# EAGLE board Brick_Doc_02 (EAGLE 6.4)
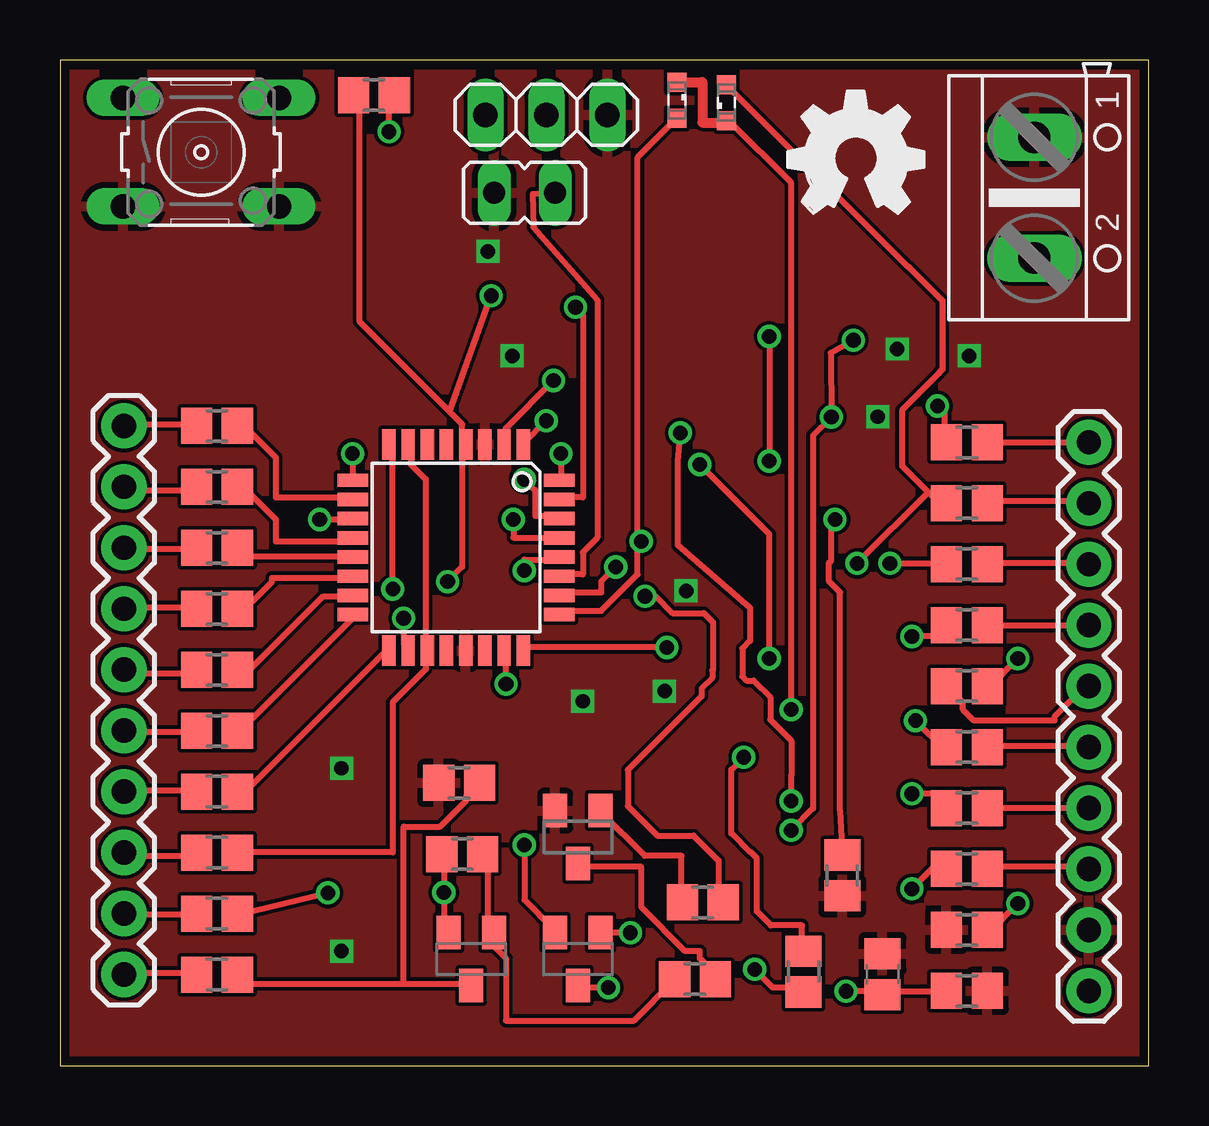
[diagram p0: board, top side]
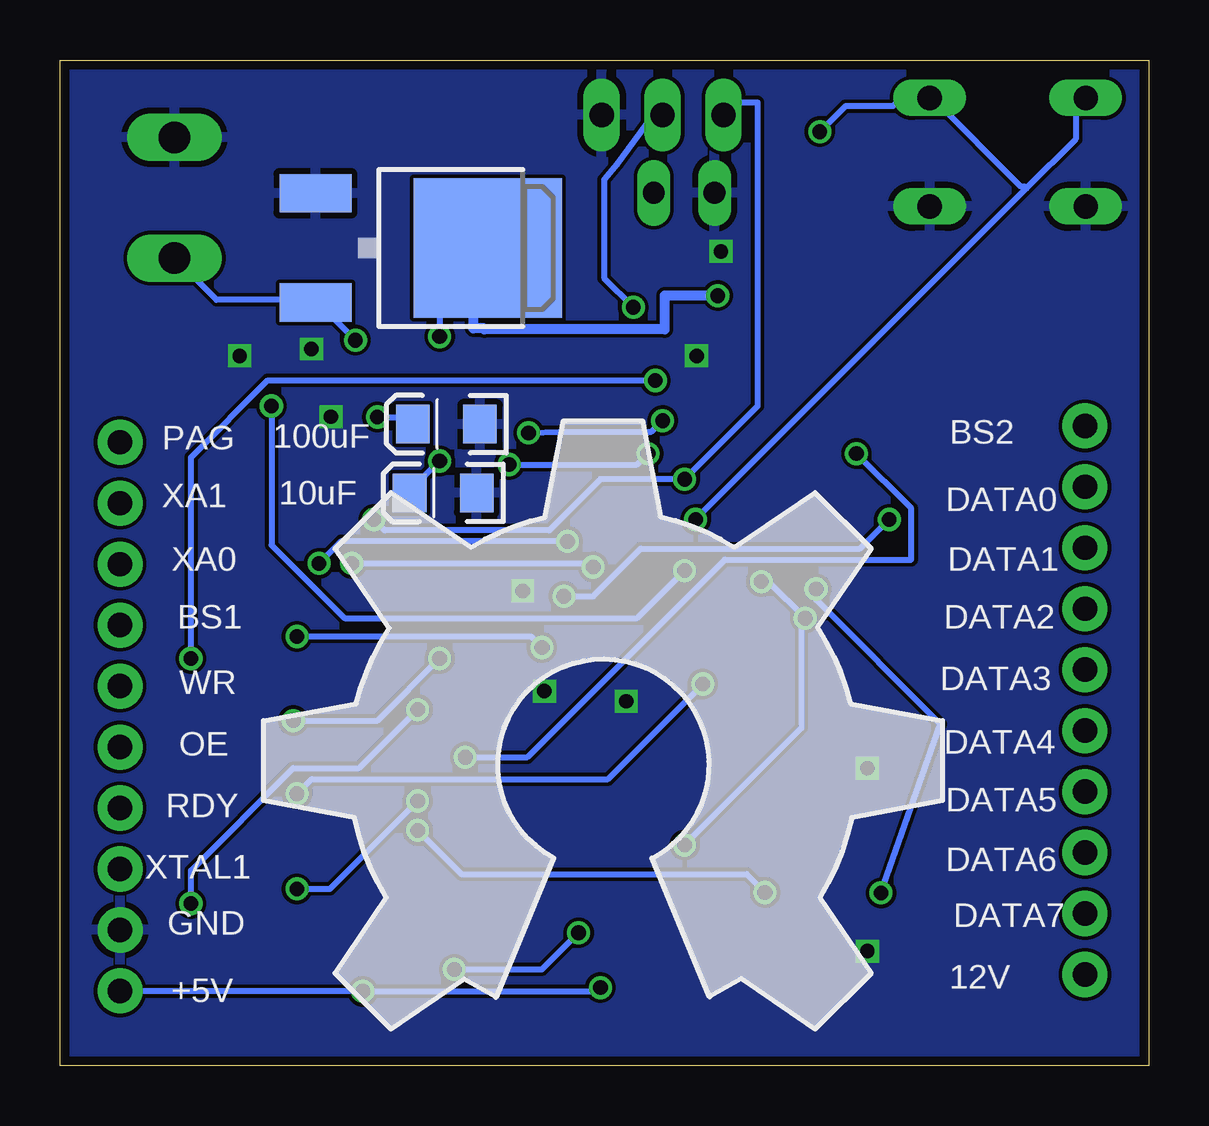
[diagram p1: board, bottom side, seen from below]

Size 45.39 x 41.9 mm. Coordinates in mm from the lower left corner, seen from the top.
Outline: 0,0 45.39,0 45.39,41.9 0,41.9 0,0
Copper layers (1*16): Top 0.0356mm / dielectric 1.5011mm / Bottom 0.0356mm
Design rules "LaenPCBOrder": minimum track width 6mil, minimum drill 13mil, track to track 6mil, track to pad 6mil, pad to pad 6mil, via to via 6mil, smd to smd 6mil, copper to edge 15mil, drill to drill 6mil, minimum pad ring 7mil, minimum via ring 7mil, stop-mask expansion 4mil, vias tented up to drill 0mil, thermal gap 10mil

## Footprints (pad centres in the part's own frame; a part is rotated, then mirrored left to right if it is on the bottom)
EIA3216 = smd 1.4 x 1.6: A 1.4,0; C -1.4,0
C0805 = smd 1.3 x 1.5: 1 -0.85,0; 2 0.85,0
V-REG_DPACK = smd 1.6 x 3: 1 -2.28,-4.8; 3 2.28,-4.8 | smd 5.8 x 6.2: 4 0,2.38
TQFP32-08 = smd 1.27 x 0.559: 1 -4.293,2.8; 2 -4.293,2; 3 -4.293,1.2; 4 -4.293,0.4; 5 -4.293,-0.4; 6 -4.293,-1.2; 7 -4.293,-2; 8 -4.293,-2.8; 17 4.293,-2.8; 18 4.293,-2; 19 4.293,-1.2; 20 4.293,-0.4; 21 4.293,0.4; 22 4.293,1.2; 23 4.293,2; 24 4.293,2.8 | smd 0.559 x 1.27: 9 -2.8,-4.293; 10 -2,-4.293; 11 -1.2,-4.293; 12 -0.4,-4.293; 13 0.4,-4.293; 14 1.2,-4.293; 15 2,-4.293; 16 2.8,-4.293; 25 2.8,4.293; 26 2,4.293; 27 1.2,4.293; 28 0.4,4.293; 29 -0.4,4.293; 30 -1.2,4.293; 31 -2,4.293; 32 -2.8,4.293
JP1 = drill 0.914 long: 1 0,-1.27; 2 0,1.27
1X03 = drill 1.016 long: 1 -2.54,0; 2 0,0; 3 2.54,0
1X10 = drill 1.016 pad 1.88: 1 0,0; 2 2.54,0; 3 5.08,0; 4 7.62,0; 5 10.16,0; 6 12.7,0; 7 15.24,0; 8 17.78,0; 9 20.32,0; 10 22.86,0
SML0603 = smd 0.8 x 0.8: A 0.75,0; C -0.75,0
SOT23-BEC = smd 1 x 1.4: B -0.95,-1.1; C 0,1.1; E 0.95,-1.1
R0805 = smd 1.3 x 1.5: 1 -0.85,0; 2 0.85,0
B3F-10XX = drill 1.016 long: 1 -3.251,2.261; 2 3.251,2.261; 3 -3.251,-2.261; 4 3.251,-2.261
SOT23 = smd 1 x 1.4: 1 -0.95,-1.1; 2 0.95,-1.1; 3 0,1.1
AK500/2 = drill 1.321 long: 1 -2.515,0; 2 2.515,0

## Placement (x,y rotation side)
C1  100uF  [EIA3216]  29.29,26.73 180 bottom
C2  10uF  [EIA3216]  29.42,23.87 180 bottom
C3  10nF  [C0805]  34.29,3.81 90 top
IC1  7805  [V-REG_DPACK]  29.94,34.07 270 bottom
IC2  ATMEGA8-DOC  [TQFP32-08]  16.51,21.59 270 top
JP1  ERASE  [JP1]  19.37,36.36 270 top
JP2  RS232  [1X03]  20.27,39.62 180 top
JP4  M10"  [1X10]  42.88,25.97 270 top
JP5  M10"  [1X10]  2.67,3.8 90 top
LED1  red  [SML0603]  25.72,40.23 270 top
LED2  green  [SML0603]  27.78,40.13 90 top
Q1  BC857  [SOT23-BEC]  21.59,4.45 180 top
Q2  BC857  [SOT23-BEC]  17.14,4.45 180 top
R1  10K  [R0805]  16.77,8.81 0 top
R2  1K  [R0805]  26.47,3.61 0 top
R3  100  [R0805]  6.55,3.79 180 top
R4  4K7  [R0805]  26.79,6.8 0 top
R5  330  [R0805]  37.8,5.65 0 top
R6  4K7  [R0805]  30.99,3.92 90 top
R7  1K  [R0805]  37.8,10.73 0 top
R8  1K  [R0805]  37.8,18.35 0 top
R9  1K  [R0805]  37.8,20.89 0 top
R10  1K  [R0805]  37.8,23.43 0 top
R11  1K  [R0805]  37.8,25.97 0 top
R12  1K  [R0805]  6.55,8.87 180 top
R13  1K  [R0805]  6.55,6.33 180 top
R14  1K  [R0805]  37.8,13.27 0 top
R15  1K  [R0805]  37.8,8.19 0 top
R16  1K  [R0805]  37.8,15.81 180 top
R17  1K  [R0805]  6.55,26.65 180 top
R18  1K  [R0805]  6.55,24.11 180 top
R19  1K  [R0805]  6.55,21.57 180 top
R20  1K  [R0805]  6.55,19.03 180 top
R21  1K  [R0805]  6.55,16.49 180 top
R22  1K  [R0805]  6.55,13.95 180 top
R23  1K  [R0805]  6.55,11.41 180 top
R24  1K  [R0805]  16.64,11.78 0 top
R25  100  [R0805]  37.8,3.11 180 top
R26  1K  [R0805]  13.08,40.43 180 top
R27  10K  [R0805]  32.61,7.92 270 top
S1  START  [B3F-10XX]  5.88,38.06 0 top
T2  BC847  [SOT23]  21.59,9.53 180 top
U$1  [OSHW_FILLX200_NOTEXT]  30.34,35.52 0 top
U$2  [OSHW_FILLX1000_NOTEXT]  36.93,1.49 0 bottom
X1  [AK500/2]  40.62,36.16 270 top

## Library data of the parts
C1 C2 IC1 IC2 JP4 JP5 = SparkFun
C3 R1-R27 = resistor
JP1 = jumper
JP2 = pinhead
LED1 LED2 = led
Q1 Q2 = transistor-pnp
S1 = switch-omron
T2 = transistor
U$1 U$2 = ohw-logo
X1 = con-ptr500

## Nets
+5V: C3.1 JP4.10 Q1.C R25.2
+12V: JP5.1 R3.2
BS1: JP4.4 R8.2
BS2: JP5.10 R17.2
DATA0: JP5.9 R18.2
DATA1: JP5.8 R19.2
DATA2: JP5.7 R20.2
DATA3: JP5.6 R21.2
DATA4: JP5.5 R22.2
DATA5: JP5.4 R23.2
DATA6: JP5.3 R12.2
DATA7: JP5.2 R13.2
GND: C1.C C2.C C3.2 IC1.1 IC2.3 IC2.21 JP1.1 JP2.1 JP4.9 R5.1 R24.1 R25.1 R27.2 S1.3 S1.4 T2.2 X1.1
N$1: Q1.B R6.1
N$2: IC2.12 R18.1
N$3: IC2.31 JP2.2
N$4: IC2.28 R11.1
N$5: IC2.2 R16.1
N$6: IC2.32 R14.1
N$7: IC2.30 JP2.3 R27.1
N$8: R2.2 T2.3
N$9: IC2.7 IC2.19 R12.1
N$10: IC2.8 R13.1
N$11: IC2.11 R4.2
N$12: IC2.9 R6.2
N$14: IC2.13 R19.1
N$16: IC2.14 R20.1
N$19: IC2.1 R15.1
N$21: IC2.23 R7.1
N$22: Q2.C R3.1 R24.2
N$24: IC2.15 R21.1
N$25: IC2.16 R22.1
N$26: IC2.17 R23.1
N$27: IC2.10 R17.1
N$29: R4.1 T2.1
N$31: IC2.27 JP1.2
N$32: LED1.C LED2.C R5.2
N$34: Q2.B R1.2 R2.1
N$42: IC2.24 R8.1
N$43: IC2.29 R26.1 S1.1 S1.2
N$47: IC2.26 LED2.A R10.1
N$48: IC2.25 LED1.A R9.1
OE: JP4.6 R14.2
PAG: JP4.1 R11.2
RDY: JP4.7 R7.2
V+: C1.A IC1.3 Q2.E R1.1 X1.2
VCC: C2.A IC1.4 IC2.4 IC2.18 Q1.E R26.2
WR: JP4.5 R16.2
XA0: JP4.3 R9.2
XA1: JP4.2 R10.2
XTAL1: JP4.8 R15.2

## Tracks (layer width: path | path; a pad name or v marks a point on that pad's centre or on a via)
+5V  (via drill 0.61)
  Top 0.254: v22.86,3.25 21.64,3.25 Q1.C | 34.29,3.1 v32.77,3.1 | 34.29,3.1 36.88,3.1 R25.2 | 34.29,3.1 C3.1
  Bottom 0.254: v22.86,3.25 23.01,3.1 v32.77,3.1 42.82,3.1 JP4.10
+12V
  Top 0.254: R3.2 5.64,3.86 2.74,3.86 JP5.1
BS1
  Top 0.254: R8.2 38.71,18.34 42.82,18.34 JP4.4
BS2
  Top 0.254: R17.2 5.64,26.72 2.74,26.72 JP5.10
DATA0
  Top 0.254: R18.2 5.64,23.98 2.74,23.98 JP5.9
DATA1
  Top 0.254: R19.2 5.64,21.54 2.74,21.54 JP5.8
DATA2
  Top 0.254: R20.2 5.64,19.1 2.74,19.1 JP5.7
DATA3
  Top 0.254: R21.2 5.64,16.36 2.74,16.36 JP5.6
DATA4
  Top 0.254: R22.2 5.64,13.92 2.74,13.92 JP5.5
DATA5
  Top 0.254: R23.2 5.64,11.48 2.74,11.48 JP5.4
DATA6
  Top 0.254: R12.2 5.64,8.74 2.74,8.74 JP5.3
DATA7
  Top 0.254: R13.2 5.64,6.3 2.74,6.3 JP5.2
GND  (via drill 0.6)
  other vias: 17.84,33.93 18.85,29.58 37.9,29.58 34.09,27.04 34.9,29.86 25.2,15.61 26.1,19.78 11.73,12.39 11.73,4.77 21.78,15.18
  pour Bottom: 0,0 45.72,0 45.72,41.91 0,41.91
  pour Top: 0,41.91 0,0 45.72,0 45.72,41.91
N$1  (via drill 0.61)
  Top 0.254: v23.77,5.54 22.55,5.54 Q1.B | v28.96,4.01 29.72,3.25 30.94,3.25 30.94,3.1 R6.1
  Bottom 0.254: v23.77,5.54 25.3,4.01 v28.96,4.01
N$2
  Top 0.254: IC2.12 12.19,21.84 8.99,21.84 8.99,22.76 7.77,23.98 7.47,23.98 R18.1
N$3  (via drill 0.61)
  Top 0.254: v21.49,31.6 21.79,31.29 21.79,23.67 20.88,23.67 IC2.31
  Bottom 0.254: v21.49,31.6 22.71,32.82 22.71,36.92 22.16,37.55 20.73,39.52 20.49,39.64 JP2.2
N$4  (via drill 0.61)
  Top 0.254: v19.36,20.62 19.36,21.08 20.73,21.08 IC2.28 | v36.58,27.48 36.88,27.18 36.88,26.11 R11.1
  Bottom 0.254: v19.36,20.62 21.34,18.64 33.53,18.64 36.58,21.69 v36.58,27.48
N$5  (via drill 0.61)
  Top 0.254: v20.57,28.55 18.59,26.57 18.59,25.96 IC2.2 | v39.93,16.97 38.71,15.75 R16.1
  Bottom 0.254: v20.57,28.55 36.73,28.55 39.93,25.35 v39.93,16.97
N$6  (via drill 0.61)
  Top 0.254: v20.88,25.5 20.88,24.43 IC2.32 | v26.67,25.04 29.57,22.15 v29.57,16.97 | v35.66,14.38 36.88,13.16 R14.1
  Bottom 0.254: v20.88,25.5 21.34,25.04 v26.67,25.04 | v29.57,16.97 32.16,14.38 v35.66,14.38
N$7  (via drill 0.61)
  Top 0.254: v19.36,24.43 19.81,23.98 19.81,22.91 20.73,22.91 IC2.30 | R27.1 32.51,10.62 32.51,19.72 32.06,20.18 32.06,20.96 32.15,21.05 32.15,22.6 v32.31,22.76
  Bottom 0.254: JP2.3 17.49,40.13 16.31,40.13 16.31,27.48 v19.36,24.43 22.86,24.43 24.99,22.3 31.85,22.3 v32.31,22.76
N$8
  Top 0.254: T2.3 21.64,8.28 24.23,8.28 24.23,6.6 26.06,4.78 26.67,4.78 26.67,4.47 27.28,3.86 27.28,3.71 R2.2
N$9
  Top 0.254: IC2.7 14.63,25.81 14.63,25.04 15.24,24.43 15.24,17.42 IC2.19 15.24,17.27 15.24,16.51 13.87,15.14 13.87,8.89 7.47,8.89 R12.1
N$10  (via drill 0.61)
  Top 0.254: v13.87,19.86 13.87,25.65 13.72,25.81 IC2.8 | v11.17,7.2 7.47,6.3 R13.1
  Bottom 0.254: v13.87,19.86 13.87,19.41 8.69,14.22 v11.17,7.2
N$11  (via drill 0.61)
  Top 0.254: v10.82,22.76 12.19,22.76 IC2.11 | R4.2 27.19,7.02 27.46,7.29 27.46,8.54 26.41,9.59 24.9,9.59 23.68,10.81 23.68,12.32 26.74,15.39 26.74,15.72 27.19,16.17 27.19,16.47 27.23,16.51 27.23,18.47 26.84,18.86 25.54,18.86 24.84,19.56 v24.38,19.56
  Bottom 0.254: v10.82,22.76 12.04,21.54 21.18,21.54 23.16,19.56 v24.38,19.56
N$12  (via drill 0.61)
  Top 0.254: v12.19,25.5 12.19,24.43 IC2.9 | R6.2 30.94,4.78 30.94,5.84 29.63,5.84 29.05,6.43 29.05,8.64 28.79,8.89 28.77,8.89 27.98,9.68 27.98,12.33 v28.5,12.85
  Bottom 0.254: v12.19,25.5 9.91,23.22 9.91,21.08 17.68,21.08 25.91,12.85 v28.5,12.85
N$14
  Top 0.254: IC2.13 12.19,21.23 7.47,21.23 7.47,21.54 R19.1
N$16
  Top 0.254: IC2.14 12.19,20.32 8.84,20.32 8.84,20.17 7.77,19.1 7.47,19.1 R20.1
N$19  (via drill 0.61)
  Top 0.254: v20.27,26.87 19.36,25.96 IC2.1 | v25.86,26.37 25.76,25.2 25.76,21.69 28.77,19.07 28.77,17.7 28.45,17.38 28.45,16.22 28.62,16.04 28.91,16.04 29.61,15.34 29.61,14.41 30.48,13.54 30.48,12.09 v30.48,11.02 | v35.51,7.37 36.42,8.28 36.88,8.28 R15.1
  Bottom 0.254: v20.27,26.87 20.73,26.42 24.54,26.42 v25.86,26.37 | v30.48,11.02 34.14,7.37 v35.51,7.37
N$21  (via drill 0.61)
  Top 0.254: v18.59,15.9 18.59,17.27 IC2.23 | v35.51,11.33 36.88,11.33 36.88,10.87 R7.1
  Bottom 0.254: v18.59,15.9 22.55,11.94 34.9,11.94 v35.51,11.33
N$22
  Top 0.254: 14.33,3.4 7.47,3.4 7.47,3.71 R3.1 | 14.33,3.4 17.07,3.4 Q2.C | 14.33,3.4 14.33,9.96 15.85,9.96 16.92,11.02 16.92,11.18 17.37,11.63 R24.2
N$24
  Top 0.254: IC2.15 12.19,19.56 10.97,19.56 7.92,16.51 7.47,16.51 R21.1
N$25
  Top 0.254: IC2.16 12.19,18.64 7.47,13.92 R22.1
N$26
  Top 0.254: IC2.17 13.56,17.27 7.77,11.48 7.47,11.48 R23.1
N$27
  Top 0.254: IC2.10 12.19,23.67 8.99,23.67 8.99,25.35 7.77,26.57 7.47,26.57 R17.1
N$29
  Top 0.254: T2.1 22.55,10.57 24.38,8.74 25.91,8.74 25.91,6.91 R4.1
N$31
  Top 0.254: IC2.27 20.88,20.47 21.79,20.47 21.79,21.39 22.4,22 22.4,31.9 19.74,34.94 19.7,36.33 JP1.2
N$32  (via drill 0.61)
  Top 0.254: v30.48,14.83 30.48,36.78 27.89,39.37 LED2.C | v39.93,6.76 38.71,5.54 R5.2
  Top 0.406: LED1.C 26.77,40.98 26.77,39.29 27.78,39.29 LED2.C
  Bottom 0.254: v30.48,14.83 32.92,12.39 35.66,12.39 39.93,8.13 v39.93,6.76
N$34
  Top 0.254: R1.2 17.68,8.74 17.83,8.59 17.83,5.84 17.98,5.69 Q2.B 18.14,5.54 18.14,4.93 18.59,4.47 18.59,1.88 23.93,1.88 25.6,3.56 R2.1
N$42  (via drill 0.61)
  Top 0.254: v25.3,17.42 19.36,17.42 IC2.24 | v35.51,17.88 36.88,17.88 36.88,18.34 R8.1
  Bottom 0.254: v25.3,17.42 25.76,17.88 v35.51,17.88
N$43  (via drill 0.61)
  Top 0.254: v13.72,38.91 13.72,40.13 13.87,40.28 R26.1 | v18.9,22.76 18.9,22 20.73,22 IC2.29
  Bottom 0.254: v13.72,38.91 12.65,39.98 10.67,39.98 10.21,40.44 9.14,40.44 S1.2 8.99,40.28 5.33,36.63 5.18,36.63 5.11,36.55 | 5.11,36.55 3.05,38.61 3.05,40.28 2.74,40.28 S1.1 | 5.11,36.55 v18.9,22.76
N$47  (via drill 0.61)
  Top 0.254: 36.2,23.9 36.58,23.52 36.88,23.52 R10.1 | 36.2,23.9 35.1,24.99 35.1,27.31 36.64,28.85 36.64,28.88 36.78,29.02 36.78,31.88 35.38,33.27 35.36,33.27 27.89,40.74 LED2.A | v23.16,20.78 22.55,20.17 22.55,19.71 20.88,19.71 IC2.26 | 36.2,23.9 v33.22,20.93
  Bottom 0.254: v23.16,20.78 23.32,20.93 v33.22,20.93
N$48  (via drill 0.61)
  Top 0.254: 24.08,21.84 24.08,20.47 22.55,18.95 20.88,18.95 20.88,18.8 IC2.25 | 24.08,21.84 24.08,37.85 25.6,39.37 LED1.A | v34.59,20.93 36.88,20.93 R9.1 | 24.08,21.84 v24.23,21.84
  Bottom 0.254: v34.59,20.93 33.68,21.84 v24.23,21.84
OE
  Top 0.254: R14.2 38.71,13.31 42.82,13.31 JP4.6
PAG
  Top 0.254: R11.2 38.71,25.96 42.82,25.96 JP4.1
RDY
  Top 0.254: R7.2 38.71,10.72 42.82,10.72 JP4.7
V+  (via drill 0.61)
  Top 0.254: Q2.E 16.15,5.69 16,5.84 v16,7.21 16,8.74 R1.1 | v33.07,30.23 32.13,29.69 v32.16,27.03 31.39,26.26 31.39,10.72 v30.48,9.8
  Bottom 0.254: v32.16,27.03 30.94,27.03 30.79,26.87 C1.A | v33.07,30.23 34.59,31.75 IC1.3 34.75,31.9 38.86,31.9 40.54,33.58 X1.2 | v16,7.21 16.76,7.98 28.65,7.98 v30.48,9.8
VCC  (via drill 0.61)
  Top 0.254: v29.57,30.38 v29.57,25.2 | v14.33,18.64 14.33,17.58 14.48,17.42 IC2.18 | v16.15,20.17 16.76,20.78 16.76,25.81 IC2.4 16.76,25.96 16.76,26.72 16.23,27.25 | v19.36,9.2 19.36,6.91 20.57,5.69 Q1.E | 16.23,27.25 12.5,30.99 12.5,40.13 12.34,40.28 R26.2 | 16.23,27.25 v17.98,32.08
  Bottom 0.254: v29.57,25.2 30.79,23.98 C2.A | v29.57,30.38 29.57,34.04 28.15,34.04 27.58,34.04 IC1.4 27.43,34.04 | v16.15,20.17 15.85,20.17 v14.33,18.64 14.48,18.64 14.48,14.07 v19.36,9.2
  Bottom 0.406: v17.98,32.08 20.19,32.08 20.19,30.68 27.7,30.68 27.7,30.71 28.15,30.71 28.15,34.04
WR
  Top 0.254: R16.2 37.03,15.75 37.64,15.14 37.64,14.83 38.1,14.38 41.45,14.38 41.45,14.53 42.82,15.9 JP4.5
XA0
  Top 0.254: R9.2 38.71,20.93 42.82,20.93 JP4.3
XA1
  Top 0.254: R10.2 38.71,23.52 42.82,23.52 JP4.2
XTAL1
  Top 0.254: R15.2 38.71,8.28 42.82,8.28 JP4.8

## Text on the board
_tsilk: Stool Softner | Variant of / Atmega Fuse Doctor | BS2 | PAG | DATA0 | XA1 | DATA1 | XA0 | DATA2 | BS1 | DATA3 | WR | DATA4 | OE | DATA5 | RDY | DATA6 | XTAL1 | DATA7 | GND | 12V | +5V
_bsilk: BS2 | 100uF | PAG | DATA0 | 10uF | XA1 | DATA1 | XA0 | DATA2 | BS1 | DATA3 | WR | DATA4 | OE | DATA5 | RDY | DATA6 | XTAL1 | DATA7 | GND | 12V | +5V